# EAGLE board CT_schematic (EAGLE 7.6.0)

Size 100 x 80 mm. Coordinates in mm from the lower left corner, seen from the top.
Outline: 0,0 100,0 100,80 0,80 0,0
Copper layers (1*16): Top 0.035mm / dielectric 1.5mm / Bottom 0.035mm
Design rules "default": minimum track width 10mil, minimum drill 24mil, track to track 8mil, track to pad 8mil, pad to pad 8mil, via to via 8mil, smd to smd 8mil, copper to edge 40mil, drill to drill 8mil, minimum pad ring 10mil, minimum via ring 8mil, stop-mask expansion 4mil, vias tented up to drill 0mil, thermal gap 10mil

## Footprints (pad centres in the part's own frame; a part is rotated, then mirrored left to right if it is on the bottom)
C0603 = smd 0.8 x 0.8: 1 -0.762,0; 2 0.762,0
C0402 = smd 0.5 x 0.5: 1 -0.508,0; 2 0.508,0
C0805 = smd 1.2 x 1.3: 1 -1.016,0; 2 1.016,0
C1206 = smd 1.3 x 1.6: 1 -1.524,0; 2 1.524,0
L0603 = smd 0.8 x 0.8: 1 -0.762,0; 2 0.762,0
DR1040 = smd 1.6 x 3.2: 1 -4.458,0; 2 4.458,0
R0603 = smd 0.8 x 0.8: 1 -0.762,0; 2 0.762,0
WLCSP64 = smd 0.34 x 0.34: A1 -1.75,1.75; A2 -1.25,1.75; A3 -0.75,1.75; A4 -0.25,1.75; A5 0.25,1.75; A6 0.75,1.75; A7 1.25,1.75; A8 1.75,1.75; B1 -1.75,1.25; B2 -1.25,1.25; B3 -0.75,1.25; B4 -0.25,1.25; B5 0.25,1.25; B6 0.75,1.25; B7 1.25,1.25; B8 1.75,1.25; C1 -1.75,0.75; C2 -1.25,0.75; C3 -0.75,0.75; C4 -0.25,0.75; C5 0.25,0.75; C6 0.75,0.75; C7 1.25,0.75; C8 1.75,0.75; D1 -1.75,0.25; D2 -1.25,0.25; D3 -0.75,0.25; D4 -0.25,0.25; D5 0.25,0.25; D6 0.75,0.25; D7 1.25,0.25; D8 1.75,0.25; E1 -1.75,-0.25; E2 -1.25,-0.25; E3 -0.75,-0.25; E4 -0.25,-0.25; E5 0.25,-0.25; E6 0.75,-0.25; E7 1.25,-0.25; E8 1.75,-0.25; F1 -1.75,-0.75; F2 -1.25,-0.75; F3 -0.75,-0.75; F4 -0.25,-0.75; F5 0.25,-0.75; F6 0.75,-0.75; F7 1.25,-0.75; F8 1.75,-0.75; G1 -1.75,-1.25; G2 -1.25,-1.25; G3 -0.75,-1.25; G4 -0.25,-1.25; G5 0.25,-1.25; G6 0.75,-1.25; G7 1.25,-1.25; G8 1.75,-1.25; H1 -1.75,-1.75; H2 -1.25,-1.75; H3 -0.75,-1.75; H4 -0.25,-1.75; H5 0.25,-1.75; H6 0.75,-1.75; H7 1.25,-1.75; H8 1.75,-1.75
SAMTEC_FTSH-105-01-L-DV-K = smd 0.762 x 2.794: 1 -2.54,-2.032; 2 -2.54,2.032; 3 -1.27,-2.032; 4 -1.27,2.032; 5 0,-2.032; 6 0,2.032; 7 1.27,-2.032; 8 1.27,2.032; 9 2.54,-2.032; 10 2.54,2.032
SOT-23-8 = smd 0.4 x 1.2: 1 -0.975,-1.3; 2 -0.325,-1.3; 3 0.325,-1.3; 4 0.975,-1.3; 5 0.975,1.3; 6 0.325,1.3; 7 -0.325,1.3; 8 -0.975,1.3
182-009-MALE = drill 1.194 pad 1.524 octagon: 1 -5.537,10.923; 2 -2.769,10.923; 3 0,10.923; 4 2.769,10.923; 5 5.537,10.923; 6 -4.153,8.08; 7 -1.384,8.08; 8 1.384,8.08; 9 4.153,8.08 | hole 3.048: -12.446,9.501; 12.446,9.501
WSON-8-PAD = smd 0.45 x 0.7: 1 -0.75,-0.95; 2 0.52,-0.95; 3 1.79,-0.95; 4 3.06,-0.95; 5 3.06,4.35; 6 1.79,4.35; 7 0.52,4.35; 8 -0.75,4.35 | smd 4 x 3.5: PAD 1.15,1.7
FCI_10118193-0001LF = smd 0.4 x 1.35: 1 -1.3,2.675; 2 -0.65,2.675; 3 0,2.675; 4 0.65,2.675; 5 1.3,2.675 | smd 1.6 x 1.4: 6 -3.2,2.45; 7 3.2,2.45 | smd 1.9 x 1.9: 8 -1.2,0; 9 1.2,0 | hole 0.5: -3.3,0; 3.3,0
SOT143B = smd 1 x 0.7: 1 -0.75,-1 | smd 0.6 x 0.7: 2 0.95,-1; 3 0.95,1; 4 -0.95,1
ASEK = smd 1.4 x 1: 1 -1.1,-0.8; 2 1.1,-0.8; 3 1.1,0.8; 4 -1.1,0.8
ASFL1 = smd 1.7 x 1.5: 1 -1.27,-1.1; 2 1.27,-1.1; 3 1.27,1.1; 4 -1.27,1.1
TSOT-23-5 = smd 1.3 x 0.62: 1 -1.31,0.95; 2 -1.31,0; 3 -1.31,-0.95; 4 1.31,-0.95; 5 1.31,0.95
DFN8_2X3MC = smd 0.813 x 0.305: 1 -1.398,0.75; 2 -1.398,0.25; 3 -1.398,-0.25; 4 -1.398,-0.75; 5 1.398,-0.75; 6 1.398,-0.25; 7 1.398,0.25; 8 1.398,0.75 | smd 1.753 x 1.549: 9 0,0
JST-2-SMD = smd 1 x 4.6: 1 -1,-3.7; 2 1,-3.7 | smd 1.6 x 3.4: NC1 -3.4,1.5; NC2 3.4,1.5
SON-6 = smd 0.55 x 0.3: 1 -0.355,0.5 | smd 0.52 x 0.3: 2 -0.37,0; 3 -0.37,-0.5; 4 0.37,-0.5; 5 0.37,0; 6 0.37,0.5
SW_4-1437565-2 = smd 1.4 x 2.1: 1 -2.23,4.55; 2 -2.23,-4.55; 3 2.23,4.55; 4 2.23,-4.55
LGM67K-G1J2-24-Z = smd 0.8 x 1.4: A -2,0; C 0,0
NC7SZ125M5X = smd 1.3 x 0.7: 1 -1.3,0.95; 2 -1.3,0; 3 -1.3,-0.95; 4 1.3,-0.95; 5 1.3,0.95

## Placement (x,y rotation side)
C1  1e-06  [C0603]  -31.75,72.39 0 top  (outside the outline)
C2  1e-07  [C0603]  -35.56,72.39 0 top  (outside the outline)
C3  1e-07  [C0603]  -39.37,72.39 0 top  (outside the outline)
C4  1e-07  [C0603]  -43.18,72.39 0 top  (outside the outline)
C5  1e-07  [C0603]  -46.99,72.39 0 top  (outside the outline)
C6  1e-07  [C0603]  -50.8,72.39 0 top  (outside the outline)
C7  4.7e-06  [C0603]  -24.13,72.39 0 top  (outside the outline)
C8  2.2e-06  [C0603]  -27.94,72.39 0 top  (outside the outline)
C9  1e-08  [C0603]  -54.61,72.39 0 top  (outside the outline)
C10  1e-06  [C0603]  -58.42,72.39 0 top  (outside the outline)
C11  1e-06  [C0603]  -62.23,72.39 0 top  (outside the outline)
C12  1e-07  [C0402]  -38.1,77.47 0 top  (outside the outline)
C13  1e-07  [C0402]  -41.91,77.47 0 top  (outside the outline)
C14  1e-06  [C0603]  -66.04,72.39 0 top  (outside the outline)
C15  1e-08  [C0402]  -45.72,77.47 0 top  (outside the outline)
C16  1e-08  [C0402]  -49.53,77.47 0 top  (outside the outline)
C17  1e-05  [C0805]  -52.07,60.96 0 top  (outside the outline)
C18  1e-05  [C0805]  -57.15,60.96 0 top  (outside the outline)
C19  1e-07  [C0402]  -53.34,77.47 0 top  (outside the outline)
C20  1e-05  [C1206]  -16.51,62.23 0 top  (outside the outline)
C21  1e-05  [C1206]  -22.86,62.23 0 top  (outside the outline)
C22  1e-08  [C0402]  -57.15,77.47 0 top  (outside the outline)
C23  1e-08  [C0402]  -60.96,77.47 0 top  (outside the outline)
C24  1e-08  [C0402]  -64.77,77.47 0 top  (outside the outline)
F1  240.0  [L0603]  -69.85,72.39 0 top  (outside the outline)
I1  3.8e-06  [DR1040]  -36.83,43.18 0 top  (outside the outline)
R2  1000.0  [R0603]  -73.66,72.39 0 top  (outside the outline)
R4  4700.0  [R0603]  -15.24,77.47 0 top  (outside the outline)
R5  4700.0  [R0603]  -19.05,77.47 0 top  (outside the outline)
R6  10000.0  [R0603]  -35.56,67.31 0 top  (outside the outline)
R7  10000.0  [R0603]  -40.64,67.31 0 top  (outside the outline)
R8  10000.0  [R0603]  -45.72,67.31 0 top  (outside the outline)
R9  10000.0  [R0603]  -50.8,67.31 0 top  (outside the outline)
R10  10000.0  [R0603]  -55.88,67.31 0 top  (outside the outline)
R11  5.0  [R0603]  -22.86,77.47 0 top  (outside the outline)
R12  120.0  [R0603]  -26.67,77.47 0 top  (outside the outline)
R13  100000.0  [R0603]  -15.24,67.31 0 top  (outside the outline)
R14  10000.0  [R0603]  -60.96,67.31 0 top  (outside the outline)
R15  10000.0  [R0603]  -66.04,67.31 0 top  (outside the outline)
R16  220000.0  [R0603]  -20.32,67.31 0 top  (outside the outline)
R17  1000000.0  [R0603]  -69.85,60.96 0 top  (outside the outline)
R18  10000.0  [R0603]  -71.12,67.31 0 top  (outside the outline)
R19  10000.0  [R0603]  -15.24,72.39 0 top  (outside the outline)
R20  9100.0  [R0603]  -30.48,77.47 0 top  (outside the outline)
R21  680000.0  [R0603]  -25.4,67.31 0 top  (outside the outline)
R22  120000.0  [R0603]  -30.48,67.31 0 top  (outside the outline)
R23  2000.0  [R0603]  -34.29,77.47 0 top  (outside the outline)
R24  10000.0  [R0603]  -20.32,72.39 0 top  (outside the outline)
U1  STM32F412REY6  [WLCSP64]  -24.13,53.34 0 top  (outside the outline)
U2  FTSH-105-01-L-DV-K  [SAMTEC_FTSH-105-01-L-DV-K]  -35.56,30.48 0 top  (outside the outline)
U3  MAX3051EKA+T  [SOT-23-8]  -27.94,60.96 0 top  (outside the outline)
U4  182-009-113R531  [182-009-MALE]  -36.83,6.35 0 top  (outside the outline)
U5  MX25R6435FZAIH0  [WSON-8-PAD]  -27.94,41.91 0 top  (outside the outline)
U6  10118193-0001LF  [FCI_10118193-0001LF]  -33.02,53.34 0 top  (outside the outline)
U7  prtr5v0u2ax  [SOT143B]  -24.13,82.55 0 top  (outside the outline)
U8  ASEK-32.768KHz-ECST  [ASEK]  -54.61,53.34 0 top  (outside the outline)
U9  ASFL1-25MHZ-NCS  [ASFL1]  -71.12,41.91 0 top  (outside the outline)
U10  ltc3406es5  [TSOT-23-5]  -62.23,60.96 0 top  (outside the outline)
U11  MCP73831T-2ACI/MC  [DFN8_2X3MC]  -34.29,81.28 0 top  (outside the outline)
U12  S2B-PH-SM4-TB(LF)(SN)  [JST-2-SMD]  -52.07,44.45 0 top  (outside the outline)
U13  TPS3895ADRYR  [SON-6]  -27.94,81.28 0 top  (outside the outline)
U14  4-1437565-2  [SW_4-1437565-2]  -57.15,27.94 0 top  (outside the outline)
U15  Q65110A2395  [LGM67K-G1J2-24-Z]  -62.23,53.34 0 top  (outside the outline)
U16  nc7sz125m5x  [NC7SZ125M5X]  -33.02,60.96 0 top  (outside the outline)
U17  nc7sz125m5x  [NC7SZ125M5X]  -39.37,60.96 0 top  (outside the outline)
U18  nc7sz125m5x  [NC7SZ125M5X]  -45.72,60.96 0 top  (outside the outline)

## Library data of the parts
C1-C24 F1 I1 R2 R4-R24 U1-U18 = circuit_tree

## Nets
CLK_U1_C8: U1.C8 U8.3
CLK_U1_D8: U1.D8 U9.3
GND: C1.2 C2.2 C3.2 C4.2 C5.2 C6.2 C7.2 C8.2 C9.2 C10.2 C11.2 C12.2 C13.2 C14.2 C15.2 C16.2 C17.2 C18.1 C18.2 C19.2 C20.2 C21.2 C22.2 C23.2 C24.2 R2.2 R6.2 R7.2 R11.2 R13.2 R16.2 R20.2 R22.2 R23.2 U1.A7 U1.B1 U1.D3 U1.G8 U1.H2 U2.3 U2.5 U3.2 U4.5 U5.4 U5.PAD U6.5 U6.6 U6.7 U6.8 U6.9 U7.1 U8.2 U9.2 U10.2 U11.6 U11.9 U12.2 U13.2 U15.C U16.2 U16.3 U17.1 U17.3 U18.1 U18.3
INPUT_USBPOWER_5V: C11.1 C20.1 R24.2 U1.D1 U6.1 U7.4 U11.1 U11.2
NET_U1_C6: R7.1 U1.C6
NET_U1_D4: R6.1 U1.D4
NET_U1_D7: R5.1 U1.D7 U18.4
NET_U1_F7: C9.1 C10.1 F1.1 U1.F7
NET_U1_H3: C8.1 U1.H3
NET_U1_H6: U15.A
NET_U1_H8: U14.3 U14.4
NET_U2_9: R11.1 U2.9
NET_U3_6: R12.2 U3.6
NET_U3_8: R13.1 U3.8
NET_U4_2: R12.2 U3.6 U4.2
NET_U4_3: R12.1 U3.7 U4.3
NET_U5_7: R4.1 U1.G7 U5.7 U17.4
NET_U10_1: U10.1
NET_U10_3: I1.1 U10.3
NET_U10_5: R16.1 R17.1 U10.5
NET_U10_ATNET_3: I1.2 R17.2
NET_U11_5: R24.1 U11.5
NET_U11_8: R23.1 U11.8
NET_U13_1: R19.1 R20.1 U13.1
NET_U13_3: R21.2 R22.1 U13.3
NET_U13_4: R18.1 U13.4 U16.4 U17.2 U18.2
NET_U14_1: R2.1 U14.1 U14.2
PROC_CAN1_RX: U1.C5 U3.4
PROC_CAN1_TX: U1.B6 U3.1
PROC_QUADSPI_BK1_IO0: U1.E2 U5.5
PROC_QUADSPI_BK1_IO1: U1.C3 U5.2
PROC_QUADSPI_BK1_IO2: R15.1 U1.F3 U5.3
PROC_QUADSPI_BK1_NCS: R14.1 U1.B5 U5.1
PROC_QUADSPI_CLK: U1.F4 U5.6
PROC_SYS_JTCK_SWCLK: R9.1 U1.B2 U2.4
PROC_SYS_JTDO_SWO: U1.A5 U2.6
PROC_SYS_JTMS_SWDIO: R10.1 U1.C2 U2.2
PROC_USB_OTG_FS_DM: U1.D3 U6.2 U7.3
PROC_USB_OTG_FS_DP: U1.C1 U6.3 U7.2
RST_OUT_U2_JTAG_RST_B: R8.1 U2.10 U16.1
VCC_S1_3V7: C17.1 C21.1 U10.4 U11.3 U11.4 U12.1
VCC_TIER1_3V3: C1.1 C2.1 C3.1 C4.1 C5.1 C6.1 C7.1 C12.1 C13.1 C14.1 C15.1 C16.1 C18.2 C19.1 C22.1 C23.1 C24.1 F1.2 I1.2 R4.2 R5.2 R8.2 R9.2 R10.2 R14.2 R15.2 R17.2 R18.2 R19.2 R21.1 U1.A1 U1.A8 U1.B7 U1.H1 U1.H7 U2.1 U3.3 U5.8 U8.4 U9.4 U13.6 U16.5 U17.5 U18.5

## Tracks (layer width: path | path; a pad name or v marks a point on that pad's centre or on a via)
CLK_U1_C8  (1 unrouted)
CLK_U1_D8  (1 unrouted)
GND  (64 unrouted)
INPUT_USBPOWER_5V  (7 unrouted)
NET_U1_C6  (1 unrouted)
NET_U1_D4  (1 unrouted)
NET_U1_D7  (2 unrouted)
NET_U1_F7  (3 unrouted)
NET_U1_H3  (1 unrouted)
NET_U1_H8  (1 unrouted)
NET_U2_9  (1 unrouted)
NET_U3_6  (1 unrouted)
NET_U3_8  (1 unrouted)
NET_U4_2  (2 unrouted)
NET_U4_3  (2 unrouted)
NET_U5_7  (3 unrouted)
NET_U10_3  (1 unrouted)
NET_U10_5  (2 unrouted)
NET_U10_ATNET_3  (1 unrouted)
NET_U11_5  (1 unrouted)
NET_U11_8  (1 unrouted)
NET_U13_1  (2 unrouted)
NET_U13_3  (2 unrouted)
NET_U13_4  (4 unrouted)
NET_U14_1  (2 unrouted)
PROC_CAN1_RX  (1 unrouted)
PROC_CAN1_TX  (1 unrouted)
PROC_QUADSPI_BK1_IO0  (1 unrouted)
PROC_QUADSPI_BK1_IO1  (1 unrouted)
PROC_QUADSPI_BK1_IO2  (2 unrouted)
PROC_QUADSPI_BK1_NCS  (2 unrouted)
PROC_QUADSPI_CLK  (1 unrouted)
PROC_SYS_JTCK_SWCLK  (2 unrouted)
PROC_SYS_JTDO_SWO  (1 unrouted)
PROC_SYS_JTMS_SWDIO  (2 unrouted)
PROC_USB_OTG_FS_DM  (2 unrouted)
PROC_USB_OTG_FS_DP  (2 unrouted)
RST_OUT_U2_JTAG_RST_B  (2 unrouted)
VCC_S1_3V7  (5 unrouted)
VCC_TIER1_3V3  (43 unrouted)